# Altium PCB OSU_Robotics_Kids.PcbDoc (part 2 of 3)
Units mm, origin at the board's own origin, x right, y up, seen from the top; angles counter-clockwise.
Board outline 80 x 40 mm, 2 copper layers (Top Layer, Bottom Layer); 19 components, 0 nets, 262 pads, 0 vias.
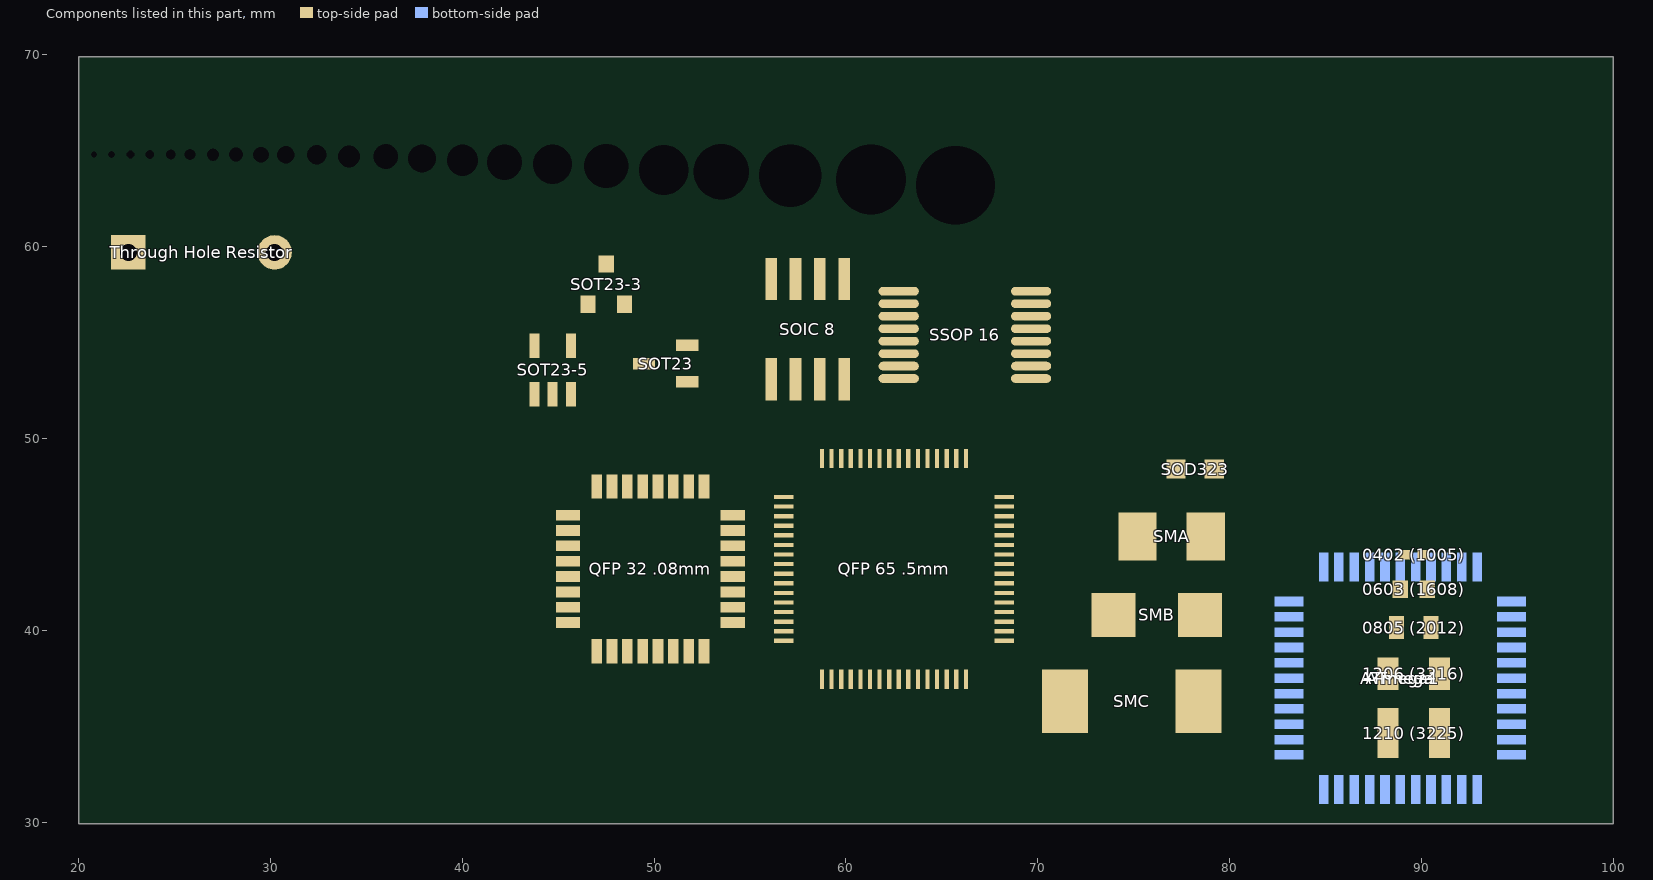
[diagram p2: the components of this part, seen from the top]

## Nets (pads, with @x,y where several pads share a name; then routed paths per layer and width w, separated by ;. In a path a pad name is that pad's centre, name@x,y a point inside that pad or via, vN(x,y) a via of type N, cw(c..) or ccw(c..) an arc to the next point about the centre after c; other vN are vias at no path point) (continued)
copper on no net: | length 2661.3
  Top Layer w0.127: 20.5,36.2 21.9,34.8 33,34.8
  Top Layer w0.254: 20.32,29.872 20.32,31.65 ; 20.5,36.9 22,35.4 25.4,35.4 26.9,35.4 33,35.4 ; 21,68.9 21,69.9 ; 22,68.9 22,69.9 ; 22.86,29.872 22.86,31.65 ; 23,68.9 23,69.9 ; 24,68.9 24,69.9 ; 25,67.9 25,69.9 ; 25.4,29.872 25.4,31.65 ; 26,68.9 26,69.9 ; 27,68.9 27,69.9 ; 27.94,29.872 27.94,31.65 ; 28,68.9 28,69.9 ; 29,68.9 29,69.9 ; 30,66.9 30,69.9 ; 30.48,29.872 30.48,31.65 ; 31,68.9 31,69.9 ; 32,68.9 32,69.9 ; 33,68.9 33,69.9 ; 33.02,29.872 33.02,32.412 ; 34,68.9 34,69.9 ; 35,67.9 35,69.9 ; 35.56,29.872 35.56,31.65 ; 36,68.9 36,69.9 ; 37,68.9 37,69.9 ; 38,68.9 38,69.9 ; 38.1,29.872 38.1,31.65 ; 39,68.9 39,69.9 ; 40,66.9 40,69.9 ; 40.64,29.872 40.64,31.65 ; 41,68.9 41,69.9 ; 42,68.9 42,69.9 ; 43,68.9 43,69.9 ; 43.18,29.872 43.18,31.65 ; 44,68.9 44,69.9 ; 45,67.9 45,69.9 ; 45.72,29.872 45.72,32.92 ; 46,68.9 46,69.9 ; 47,68.9 47,69.9 ; 48,68.9 48,69.9 ; 48.26,29.872 48.26,31.65 ; 49,68.9 49,69.9 ; 50,66.9 50,69.9 ; 50.8,29.872 50.8,31.65 ; 51,68.9 51,69.9 ; 52,68.9 52,69.9 ; 53,68.9 53,69.9 ; 53.34,29.872 53.34,31.65 ; 54,68.9 54,69.9 ; 55,67.9 55,69.9 ; 55.88,29.872 55.88,31.65 ; 56,68.9 56,69.9 ; 57,68.9 57,69.9 ; 58,68.9 58,69.9 ; 58.42,29.872 58.42,31.65 ; 59,68.9 59,69.9 ; 60,66.9 60,69.9 ; 60.96,29.872 60.96,32.412 ; 61,68.9 61,69.9 ; 62,68.9 62,69.9 ; 63,68.9 63,69.9 ; 63.5,29.872 63.5,31.65 ; 64,68.9 64,69.9 ; 65,67.9 65,69.9 ; 66,68.9 66,69.9 ; 66.04,29.872 66.04,31.65 ; 67,68.9 67,69.9 ; 68,68.9 68,69.9 ; 68.58,29.872 68.58,31.65 ; 69,68.9 69,69.9 ; 70,66.9 70,69.9 ; 71,68.9 71,69.9 ; 71.12,29.872 71.12,31.65 ; 72,68.9 72,69.9 ; 73,68.9 73,69.9 ; 73.66,29.872 73.66,32.92 ; 74,68.9 74,69.9 ; 75,67.9 75,69.9 ; 76,68.9 76,69.9 ; 76.2,29.872 76.2,31.65 ; 77,68.9 77,69.9 ; 78,68.9 78,69.9 ; 78.74,29.872 78.74,31.65 ; 79,68.9 79,69.9 ; 80,66.9 80,69.9 ; 81,68.9 81,69.9 ; 81.28,29.872 81.28,31.65 ; 82,68.9 82,69.9 ; 83,68.9 83,69.9 ; 83.82,29.872 83.82,31.65 ; 84,68.9 84,69.9 ; 85,67.9 85,69.9 ; 86,68.9 86,69.9 ; 86.36,29.872 86.36,31.65 ; 87,68.9 87,69.9 ; 88,68.9 88,69.9 ; 88.9,29.872 88.9,32.412 ; 89,68.9 89,69.9 ; 90,66.9 90,69.9 ; 91,68.9 91,69.9 ; 91.44,29.872 91.44,31.65 ; 92,68.9 92,69.9 ; 93,68.9 93,69.9 ; 93.98,29.872 93.98,31.65 ; 94,68.9 94,69.9 ; 95,67.9 95,69.9 ; 96,68.9 96,69.9 ; 96.52,29.872 96.52,31.65 ; 97,68.9 97,69.9 ; 98,68.9 98,69.9 ; 99,68.9 99,69.9 ; 99.06,29.872 99.06,31.65
  Top Layer w0.305: 20.5,37.7 20.8,37.4 22.2,36 26.6,36 33,36
  Top Layer w0.381: 20.5,38.5 22.403,36.597 32.9,36.597
  Top Layer w0.508: 20.5,39.5 22.705,37.295 32.9,37.295
  Top Layer w0.635: 20.5,40.6 22.979,38.121 32.9,38.121
  Top Layer w1.27: 20.8,41.9 23.373,39.327 32.497,39.327 32.5,39.33
  Bottom Layer w0.077: 68.259,62.058 71.557,62.058 ; 68.259,62.211 72.171,62.211 ; 68.259,62.364 72.478,62.364 ; 68.259,62.594 72.861,62.594 ; 68.259,62.748 73.015,62.748 ; 68.259,62.901 73.168,62.901 ; 68.259,63.055 73.321,63.055 ; 68.259,63.208 73.475,63.208 ; 68.259,67.887 73.245,67.887 ; 68.259,68.041 73.091,68.041 ; 68.259,68.194 73.015,68.194 ; 68.259,68.348 72.785,68.348 ; 68.259,68.501 72.554,68.501 ; 68.259,68.654 72.324,68.654 ; 68.259,68.808 72.094,68.808 ; 68.259,68.961 71.711,68.961 ; 68.259,69.115 71.02,69.115 ; 68.335,61.904 68.412,61.904 ; 68.335,61.981 71.327,61.981 ; 68.335,62.134 71.941,62.134 ; 68.335,62.288 72.324,62.288 ; 68.335,62.441 72.631,62.441 ; 68.335,62.518 72.708,62.518 ; 68.335,62.671 72.938,62.671 ; 68.335,62.825 73.168,62.825 ; 68.335,62.978 73.245,62.978 ; 68.335,63.131 73.398,63.131 ; 68.335,67.964 73.245,67.964 ; 68.335,68.117 73.091,68.117 ; 68.335,68.271 72.861,68.271 ; 68.335,68.424 72.708,68.424 ; 68.335,68.578 72.478,68.578 ; 68.335,68.731 72.171,68.731 ; 68.335,68.885 71.864,68.885 ; 68.335,69.038 71.404,69.038 ; 68.335,69.191 68.412,69.191 ; 68.412,63.285 68.566,63.285 ; 68.489,61.904 68.566,61.904 ; 68.566,67.811 68.642,67.811 ; 68.566,69.191 68.642,69.191 ; 68.642,61.904 68.719,61.904 ; 68.719,63.285 68.796,63.285 ; 68.719,69.191 68.796,69.191 ; 68.796,61.904 68.872,61.904 ; 68.796,67.811 68.872,67.811 ; 68.872,63.285 68.949,63.285 ; 68.872,69.191 69.026,69.191 ; 69.026,61.904 69.103,61.904 ; 69.026,63.285 69.103,63.285 ; 69.103,69.191 69.179,69.191 ; 69.179,61.904 69.256,61.904 ; 69.179,63.285 69.256,63.285 ; 69.179,67.811 69.256,67.811 ; 69.256,69.191 69.333,69.191 ; 69.333,63.285 69.409,63.285 ; 69.409,61.904 69.486,61.904 ; 69.409,67.811 69.486,67.811 ; 69.409,69.191 69.486,69.191 ; 69.486,59.449 70.1,59.449 ; 69.486,59.526 70.023,59.526 ; 69.486,59.603 70.1,59.603 ; 69.486,59.68 70.023,59.68 ; 69.486,59.756 70.023,59.756 ; 69.486,59.833 70.1,59.833 ; 69.486,59.986 70.1,59.986 ; 69.486,63.285 69.64,63.285 ; 69.563,59.219 70.253,59.219 ; 69.563,59.296 70.176,59.296 ; 69.563,59.373 70.1,59.373 ; 69.563,59.91 70.1,59.91 ; 69.563,60.063 70.253,60.063 ; 69.563,60.14 70.33,60.14 ; 69.563,69.191 69.64,69.191 ; 69.64,59.066 71.327,59.066 ; 69.64,59.143 70.483,59.143 ; 69.64,60.217 71.327,60.217 ; 69.64,60.293 71.404,60.293 ; 69.64,61.904 69.716,61.904 ; 69.716,58.989 71.327,58.989 ; 69.716,60.37 70.713,60.37 ; 69.716,69.191 69.793,69.191 ; 69.793,63.285 69.87,63.285 ; 69.793,67.811 69.946,67.811 ; 69.87,58.912 70.713,58.912 ; 69.87,60.447 70.56,60.447 ; 69.87,61.904 69.946,61.904 ; 69.87,69.191 69.946,69.191 ; 69.946,58.836 70.637,58.836 ; 69.946,63.285 70.1,63.285 ; 70.023,69.191 70.1,69.191 ; 70.1,60.523 70.33,60.523 ; 70.1,61.904 70.253,61.904 ; 70.176,58.759 70.253,58.759 ; 70.253,63.285 70.407,63.285 ; 70.253,67.811 70.33,67.811 ; 70.253,69.191 70.33,69.191 ; 70.33,58.759 70.407,58.759 ; 70.33,61.904 70.407,61.904 ; 70.407,60.14 71.327,60.14 ; 70.407,67.811 73.398,67.811 ; 70.407,69.191 70.483,69.191 ; 70.483,61.904 70.56,61.904 ; 70.483,63.285 73.552,63.285 ; 70.56,59.143 71.404,59.143 ; 70.56,69.191 70.637,69.191 ; 70.637,59.219 71.327,59.219 ; 70.637,61.904 70.713,61.904 ; 70.713,59.296 71.404,59.296 ; 70.713,59.986 71.327,59.986 ; 70.713,60.063 71.327,60.063 ; 70.79,58.912 71.404,58.912 ; 70.79,59.373 71.327,59.373 ; 70.79,59.449 71.327,59.449 ; 70.79,59.526 71.404,59.526 ; 70.79,59.68 71.404,59.68 ; 70.79,59.756 71.327,59.756 ; 70.79,59.833 71.404,59.833 ; 70.79,59.91 71.327,59.91 ; 70.79,60.37 71.327,60.37 ; 70.79,60.447 71.404,60.447 ; 70.79,60.523 71.327,60.523 ; 70.79,60.677 71.404,60.677 ; 70.79,60.753 71.327,60.753 ; 70.79,60.83 71.327,60.83 ; 70.79,60.907 71.404,60.907 ; 70.79,61.06 71.327,61.06 ; 70.79,61.137 71.404,61.137 ; 70.79,61.214 71.327,61.214 ; 70.79,61.29 70.867,61.29 ; 70.79,67.734 73.398,67.734 ; 70.867,58.836 71.327,58.836 ; 70.867,59.603 71.327,59.603 ; 70.867,60.6 71.404,60.6 ; 70.867,60.984 71.327,60.984 ; 70.867,63.362 73.552,63.362 ; 70.944,61.29 71.02,61.29 ; 71.02,63.438 73.628,63.438 ; 71.02,67.657 73.475,67.657 ; 71.174,61.29 71.25,61.29 ; 71.174,63.515 73.705,63.515 ; 71.174,67.58 73.552,67.58 ; 71.327,67.504 73.552,67.504 ; 71.404,63.592 73.705,63.592 ; 71.404,67.427 73.628,67.427 ; 71.48,63.668 73.782,63.668 ; 71.557,67.35 73.705,67.35 ; 71.634,61.904 71.711,61.904 ; 71.634,62.058 71.711,62.058 ; 71.634,63.745 73.782,63.745 ; 71.634,63.822 73.858,63.822 ; 71.634,67.274 73.705,67.274 ; 71.711,67.197 73.705,67.197 ; 71.787,58.836 72.324,58.836 ; 71.787,59.066 73.475,59.066 ; 71.787,59.219 72.554,59.219 ; 71.787,59.373 72.401,59.373 ; 71.787,59.526 72.401,59.526 ; 71.787,59.603 72.324,59.603 ; 71.787,59.833 72.401,59.833 ; 71.787,59.986 72.401,59.986 ; 71.787,60.14 72.401,60.14 ; 71.787,60.217 72.324,60.217 ; 71.787,60.37 72.401,60.37 ; 71.787,61.981 75.469,61.981 ; 71.787,63.899 73.858,63.899 ; 71.787,67.12 73.782,67.12 ; 71.864,58.912 72.401,58.912 ; 71.864,58.989 72.401,58.989 ; 71.864,59.143 73.475,59.143 ; 71.864,59.296 72.401,59.296 ; 71.864,59.449 72.401,59.449 ; 71.864,59.68 72.401,59.68 ; 71.864,59.756 72.401,59.756 ; 71.864,59.91 72.324,59.91 ; 71.864,60.063 72.401,60.063 ; 71.864,60.293 72.401,60.293 ; 71.864,60.447 72.401,60.447 ; 71.864,63.975 73.935,63.975 ; 71.864,67.044 73.858,67.044 ; 71.941,64.052 73.935,64.052 ; 71.941,64.129 73.935,64.129 ; 71.941,66.967 73.858,66.967 ; 72.017,64.205 74.012,64.205 ; 72.017,66.813 73.935,66.813 ; 72.017,66.89 73.858,66.89 ; 72.094,62.058 75.546,62.058 ; 72.094,64.282 74.012,64.282 ; 72.094,64.359 74.012,64.359 ; 72.094,64.435 74.089,64.435 ; 72.094,66.66 73.935,66.66 ; 72.094,66.737 73.935,66.737 ; 72.171,61.904 72.248,61.904 ; 72.171,64.512 74.012,64.512 ; 72.171,66.507 74.012,66.507 ; 72.171,66.583 74.012,66.583 ; 72.248,64.589 74.089,64.589 ; 72.248,64.666 74.089,64.666 ; 72.248,64.742 74.089,64.742 ; 72.248,64.819 74.165,64.819 ; 72.248,66.276 74.089,66.276 ; 72.248,66.353 74.089,66.353 ; 72.248,66.43 74.012,66.43 ; 72.324,62.134 75.623,62.134 ; 72.324,64.896 74.089,64.896 ; 72.324,64.972 74.165,64.972 ; 72.324,65.049 74.089,65.049 ; 72.324,65.126 74.165,65.126 ; 72.324,65.279 74.165,65.279 ; 72.324,65.433 74.089,65.433 ; 72.324,65.663 74.165,65.663 ; 72.324,65.74 74.165,65.74 ; 72.324,65.893 74.165,65.893 ; 72.324,65.97 74.089,65.97 ; 72.324,66.046 74.089,66.046 ; 72.324,66.123 74.089,66.123 ; 72.324,66.2 74.089,66.2 ; 72.401,65.203 74.165,65.203 ; 72.401,65.356 74.165,65.356 ; 72.401,65.509 74.165,65.509 ; 72.401,65.586 74.165,65.586 ; 72.401,65.816 74.089,65.816 ; 72.478,58.912 73.398,58.912 ; 72.478,58.989 73.475,58.989 ; 72.478,61.904 72.554,61.904 ; 72.478,62.211 75.623,62.211 ; 72.631,58.836 73.245,58.836 ; 72.631,62.288 75.699,62.288 ; 72.708,61.904 72.785,61.904 ; 72.785,62.364 75.776,62.364 ; 72.861,58.759 72.938,58.759 ; 72.861,61.904 72.938,61.904 ; 72.861,62.441 75.776,62.441 ; 72.938,59.219 73.552,59.219 ; 72.938,59.296 73.552,59.296 ; 73.015,58.759 73.091,58.759 ; 73.015,59.373 73.552,59.373 ; 73.015,59.449 73.552,59.449 ; 73.015,59.526 73.552,59.526 ; 73.015,59.603 73.552,59.603 ; 73.015,59.68 73.552,59.68 ; 73.015,59.756 73.552,59.756 ; 73.015,59.833 73.552,59.833 ; 73.015,59.91 73.552,59.91 ; 73.015,59.986 73.552,59.986 ; 73.015,60.063 73.552,60.063 ; 73.015,60.14 73.552,60.14 ; 73.015,60.217 73.552,60.217 ; 73.015,60.293 73.552,60.293 ; 73.015,60.37 73.552,60.37 ; 73.015,60.447 73.552,60.447 ; 73.015,62.518 75.853,62.518 ; 73.015,62.594 75.853,62.594 ; 73.091,61.904 73.168,61.904 ; 73.168,62.671 75.93,62.671 ; 73.245,62.748 76.006,62.748 ; 73.321,61.904 73.398,61.904 ; 73.321,62.825 76.006,62.825 ; 73.398,62.901 76.083,62.901 ; 73.475,62.978 76.16,62.978 ; 73.552,61.904 73.628,61.904 ; 73.552,63.055 76.16,63.055 ; 73.628,63.131 76.236,63.131 ; 73.705,63.208 76.236,63.208 ; 73.782,61.904 73.935,61.904 ; 73.782,63.285 73.858,63.285 ; 73.935,59.219 74.549,59.219 ; 73.935,59.68 74.549,59.68 ; 73.935,60.447 74.549,60.447 ; 73.935,60.907 74.549,60.907 ; 73.935,63.285 74.012,63.285 ; 74.012,58.836 74.549,58.836 ; 74.012,58.912 74.549,58.912 ; 74.012,58.989 74.549,58.989 ; 74.012,59.066 74.549,59.066 ; 74.012,59.143 74.549,59.143 ; 74.012,59.296 74.549,59.296 ; 74.012,59.373 74.549,59.373 ; 74.012,59.449 74.549,59.449 ; 74.012,59.526 74.549,59.526 ; 74.012,59.603 74.549,59.603 ; 74.012,59.756 74.549,59.756 ; 74.012,59.833 74.549,59.833 ; 74.012,59.91 74.549,59.91 ; 74.012,59.986 74.549,59.986 ; 74.012,60.063 74.549,60.063 ; 74.012,60.14 74.549,60.14 ; 74.012,60.217 74.549,60.217 ; 74.012,60.293 74.549,60.293 ; 74.012,60.37 74.549,60.37 ; 74.012,60.523 74.549,60.523 ; 74.012,60.6 74.549,60.6 ; 74.012,60.677 74.549,60.677 ; 74.012,60.753 74.549,60.753 ; 74.012,60.83 74.549,60.83 ; 74.012,60.984 74.549,60.984 ; 74.012,61.06 74.549,61.06 ; 74.012,61.137 74.549,61.137 ; 74.012,61.214 74.549,61.214 ; 74.012,61.904 74.089,61.904 ; 74.089,61.29 74.165,61.29 ; 74.089,63.285 74.165,63.285 ; 74.165,61.904 74.242,61.904 ; 74.242,61.29 74.319,61.29 ; 74.242,63.285 74.319,63.285 ; 74.319,61.904 74.395,61.904 ; 74.395,61.29 74.472,61.29 ; 74.395,63.285 76.313,63.285 ; 74.395,66.89 76.16,66.89 ; 74.395,66.967 76.16,66.967 ; 74.395,67.044 76.16,67.044 ; 74.395,67.12 76.236,67.12 ; 74.395,67.197 76.16,67.197 ; 74.395,67.274 76.236,67.274 ; 74.395,67.35 76.236,67.35 ; 74.395,67.427 76.236,67.427 ; 74.395,67.504 76.313,67.504 ; 74.395,67.657 76.467,67.657 ; 74.472,63.362 76.39,63.362 ; 74.472,66.583 76.236,66.583 ; 74.472,66.66 76.236,66.66 ; 74.472,66.737 76.236,66.737 ; 74.472,66.813 76.236,66.813 ; 74.472,67.58 76.313,67.58 ; 74.472,67.734 76.467,67.734 ; 74.472,67.811 76.62,67.811 ; 74.472,67.887 76.85,67.887 ; 74.549,61.904 74.626,61.904 ; 74.549,63.438 76.39,63.438 ; 74.549,63.515 76.467,63.515 ; 74.549,66.43 76.39,66.43 ; 74.549,66.507 76.313,66.507 ; 74.549,67.964 77.08,67.964 ; 74.549,68.041 80.379,68.041 ; 74.626,63.592 76.543,63.592 ; 74.626,66.2 76.543,66.2 ; 74.626,66.276 76.467,66.276 ; 74.626,66.353 76.39,66.353 ; 74.626,68.117 80.379,68.117 ; 74.626,68.194 80.379,68.194 ; 74.702,61.904 74.779,61.904 ; 74.702,63.668 76.543,63.668 ; 74.702,63.745 76.62,63.745 ; 74.702,66.123 76.697,66.123 ; 74.702,68.271 80.379,68.271 ; 74.702,68.348 80.379,68.348 ; 74.779,63.822 76.62,63.822 ; 74.779,66.046 76.85,66.046 ; 74.779,68.424 80.379,68.424 ; 74.856,59.066 76.236,59.066 ; 74.856,60.37 76.006,60.37 ; 74.856,63.899 76.697,63.899 ; 74.856,63.975 76.773,63.975 ; 74.856,65.893 79.842,65.893 ; 74.856,65.97 77.08,65.97 ; 74.856,68.501 80.379,68.501 ; 74.932,58.912 76.006,58.912 ; 74.932,58.989 76.083,58.989 ; 74.932,59.143 75.316,59.143 ; 74.932,59.219 75.009,59.219 ; 74.932,60.063 75.009,60.063 ; 74.932,60.14 75.239,60.14 ; 74.932,60.217 76.16,60.217 ; 74.932,60.293 76.083,60.293 ; 74.932,60.447 75.853,60.447 ; 74.932,61.904 75.009,61.904 ; 74.932,64.052 76.773,64.052 ; 74.932,68.578 80.379,68.578 ; 75.009,58.836 75.853,58.836 ; 75.009,64.129 76.85,64.129 ; 75.009,64.205 76.927,64.205 ; 75.009,65.74 79.842,65.74 ; 75.009,65.816 79.765,65.816 ; 75.009,68.654 80.379,68.654 ; 75.086,64.282 76.927,64.282 ; 75.162,60.523 75.469,60.523 ; 75.162,61.904 75.239,61.904 ; 75.162,64.359 77.003,64.359 ; 75.162,64.435 77.157,64.435 ; 75.162,65.663 79.842,65.663 ; 75.162,68.731 80.379,68.731 ; 75.239,58.759 75.316,58.759 ; 75.239,64.512 77.157,64.512 ; 75.239,65.586 79.765,65.586 ; 75.239,68.808 80.379,68.808 ; 75.316,60.14 76.236,60.14 ; 75.316,65.509 79.842,65.509 ; 75.393,59.143 76.236,59.143 ; 75.393,61.904 75.469,61.904 ; 75.393,64.589 77.31,64.589 ; 75.393,64.666 77.464,64.666 ; 75.393,68.885 80.379,68.885 ; 75.469,58.759 75.546,58.759 ; 75.469,64.742 79.842,64.742 ; 75.469,65.433 79.765,65.433 ; 75.546,64.819 79.765,64.819 ; 75.546,68.961 80.379,68.961 ; 75.623,58.759 75.699,58.759 ; 75.623,59.219 76.313,59.219 ; 75.623,60.063 76.313,60.063 ; 75.623,64.896 79.842,64.896 ; 75.623,65.356 79.765,65.356 ; 75.699,59.296 76.313,59.296 ; 75.699,59.986 76.313,59.986 ; 75.699,64.972 79.842,64.972 ; 75.699,65.279 75.776,65.279 ; 75.776,59.373 76.39,59.373 ; 75.776,59.449 76.39,59.449 ; 75.776,59.68 76.39,59.68 ; 75.776,59.833 76.39,59.833 ; 75.776,59.91 76.313,59.91 ; 75.853,59.526 76.39,59.526 ; 75.853,59.603 76.39,59.603 ; 75.853,59.756 76.39,59.756 ; 75.853,65.049 79.765,65.049 ; 75.853,65.279 79.842,65.279 ; 75.853,69.038 80.379,69.038 ; 76.006,65.126 79.842,65.126 ; 76.006,65.203 79.842,65.203 ; 76.083,69.115 76.16,69.115 ; 76.236,69.115 80.379,69.115 ; 76.467,69.191 76.543,69.191 ; 76.62,59.066 77.31,59.066 ; 76.697,58.912 77.31,58.912 ; 76.697,58.989 77.31,58.989 ; 76.697,59.143 77.31,59.143 ; 76.773,58.836 77.234,58.836 ; 76.773,59.219 77.234,59.219 ; 76.773,69.191 76.85,69.191 ; 76.85,59.296 77.003,59.296 ; 76.927,58.759 77.003,58.759 ; 76.927,69.191 77.003,69.191 ; 77.08,69.191 77.157,69.191 ; 77.157,67.964 77.387,67.964 ; 77.234,69.191 77.31,69.191 ; 77.387,69.191 77.464,69.191 ; 77.464,67.964 77.54,67.964 ; 77.54,59.219 78.154,59.219 ; 77.54,59.373 78.231,59.373 ; 77.617,59.066 78.921,59.066 ; 77.617,59.143 78.231,59.143 ; 77.617,59.296 78.077,59.296 ; 77.617,59.449 78.308,59.449 ; 77.617,59.526 78.614,59.526 ; 77.617,59.603 78.768,59.603 ; 77.617,60.447 78.614,60.447 ; 77.617,67.964 77.771,67.964 ; 77.617,69.191 77.694,69.191 ; 77.694,58.989 78.921,58.989 ; 77.694,60.14 77.847,60.14 ; 77.694,60.217 78.921,60.217 ; 77.694,60.293 78.844,60.293 ; 77.694,60.37 78.768,60.37 ; 77.771,58.912 78.998,58.912 ; 77.771,59.68 78.844,59.68 ; 77.771,69.191 77.847,69.191 ; 77.847,67.964 77.924,67.964 ; 77.924,58.836 78.921,58.836 ; 77.924,59.756 78.921,59.756 ; 77.924,60.523 78.231,60.523 ; 77.924,69.191 78.001,69.191 ; 78.001,67.964 79.842,67.964 ; 78.077,59.833 78.921,59.833 ; 78.077,62.134 79.765,62.134 ; 78.077,62.364 79.765,62.364 ; 78.077,62.671 79.842,62.671 ; 78.077,62.825 79.842,62.825 ; 78.077,63.055 79.842,63.055 ; 78.077,63.285 79.842,63.285 ; 78.077,63.592 79.765,63.592 ; 78.077,63.745 79.842,63.745 ; 78.077,63.975 79.842,63.975 ; 78.077,64.205 79.765,64.205 ; 78.077,64.435 79.842,64.435 ; 78.077,64.666 79.842,64.666 ; 78.077,65.97 79.842,65.97 ; 78.077,66.123 79.842,66.123 ; 78.077,66.353 79.842,66.353 ; 78.077,66.66 79.765,66.66 ; 78.077,66.813 79.765,66.813 ; 78.077,67.044 79.765,67.044 ; 78.077,67.274 79.765,67.274 ; 78.077,67.504 79.842,67.504 ; 78.077,67.734 79.842,67.734 ; 78.077,69.191 78.231,69.191 ; 78.154,61.981 79.842,61.981 ; 78.154,62.058 79.842,62.058 ; 78.154,62.211 79.842,62.211 ; 78.154,62.288 79.842,62.288 ; 78.154,62.441 79.842,62.441 ; 78.154,62.518 79.842,62.518 ; 78.154,62.594 79.765,62.594 ; 78.154,62.748 79.842,62.748 ; 78.154,62.901 79.765,62.901 ; 78.154,62.978 79.765,62.978 ; 78.154,63.131 79.765,63.131 ; 78.154,63.208 79.842,63.208 ; 78.154,63.362 79.765,63.362 ; 78.154,63.438 79.842,63.438 ; 78.154,63.515 79.842,63.515 ; 78.154,63.668 79.842,63.668 ; 78.154,63.822 79.765,63.822 ; 78.154,63.899 79.842,63.899 ; 78.154,64.052 79.842,64.052 ; 78.154,64.129 79.765,64.129 ; 78.154,64.282 79.842,64.282 ; 78.154,64.359 79.765,64.359 ; 78.154,64.512 79.842,64.512 ; 78.154,64.589 79.765,64.589 ; 78.154,66.046 79.765,66.046 ; 78.154,66.2 79.842,66.2 ; 78.154,66.276 79.765,66.276 ; 78.154,66.43 79.842,66.43 ; 78.154,66.507 79.842,66.507 ; 78.154,66.583 79.765,66.583 ; 78.154,66.737 79.842,66.737 ; 78.154,66.89 79.842,66.89 ; 78.154,66.967 79.842,66.967 ; 78.154,67.12 79.842,67.12 ; 78.154,67.197 79.842,67.197 ; 78.154,67.35 79.842,67.35 ; 78.154,67.427 79.842,67.427 ; 78.154,67.58 79.765,67.58 ; 78.154,67.657 79.842,67.657 ; 78.154,67.811 79.765,67.811 ; 78.154,67.887 79.842,67.887 ; 78.231,58.759 78.308,58.759 ; 78.231,61.904 78.308,61.904 ; 78.308,59.91 78.921,59.91 ; 78.308,60.14 78.921,60.14 ; 78.308,69.191 78.384,69.191 ; 78.384,58.759 78.461,58.759 ; 78.384,59.986 78.921,59.986 ; 78.384,60.063 78.921,60.063 ; 78.384,60.523 78.461,60.523 ; 78.384,61.904 78.461,61.904 ; 78.538,58.759 78.614,58.759 ; 78.538,59.143 78.614,59.143 ; 78.538,69.191 78.614,69.191 ; 78.614,61.904 78.691,61.904 ; 78.691,59.143 78.921,59.143 ; 78.768,69.191 78.844,69.191 ; 78.844,61.904 78.921,61.904 ; 78.921,69.191 78.998,69.191 ; 79.075,61.904 79.151,61.904 ; 79.075,69.191 79.151,69.191 ; 79.151,58.912 80.225,58.912 ; 79.151,58.989 80.379,58.989 ; 79.151,59.066 80.455,59.066 ; 79.151,59.143 79.612,59.143 ; 79.151,59.219 79.228,59.219 ; 79.151,60.063 79.228,60.063 ; 79.151,60.217 80.455,60.217 ; 79.151,60.293 80.302,60.293 ; 79.151,60.447 80.149,60.447 ; 79.228,58.836 80.149,58.836 ; 79.228,60.14 79.535,60.14 ; 79.228,60.37 80.225,60.37 ; 79.228,69.191 79.305,69.191 ; 79.305,61.904 79.458,61.904 ; 79.458,60.523 79.688,60.523 ; 79.458,69.191 79.535,69.191 ; 79.535,58.759 79.612,58.759 ; 79.535,61.904 79.612,61.904 ; 79.612,60.14 80.532,60.14 ; 79.612,69.191 79.688,69.191 ; 79.688,58.759 79.765,58.759 ; 79.688,59.143 80.532,59.143 ; 79.765,60.523 79.842,60.523 ; 79.765,69.191 79.842,69.191 ; 79.842,58.759 79.918,58.759 ; 79.842,60.063 80.532,60.063 ; 79.918,59.219 80.532,59.219 ; 79.918,59.296 80.609,59.296 ; 79.918,67.964 80.072,67.964 ; 79.918,69.191 80.072,69.191 ; 79.995,59.373 80.609,59.373 ; 79.995,59.91 80.609,59.91 ; 79.995,59.986 80.609,59.986 ; 80.072,59.449 80.609,59.449 ; 80.072,59.526 80.685,59.526 ; 80.072,59.603 80.609,59.603 ; 80.072,59.68 80.685,59.68 ; 80.072,59.756 80.609,59.756 ; 80.072,59.833 80.609,59.833 ; 80.149,67.964 80.225,67.964 ; 80.225,69.191 80.302,69.191 ; 80.302,67.964 80.379,67.964 ; 80.532,64.896 82.296,64.896 ; 80.532,65.126 82.296,65.126 ; 80.532,65.433 82.296,65.433 ; 80.532,65.74 82.296,65.74 ; 80.532,66.046 82.296,66.046 ; 80.532,66.353 82.22,66.353 ; 80.532,66.66 82.296,66.66 ; 80.532,66.967 82.296,66.967 ; 80.532,67.274 82.296,67.274 ; 80.532,67.58 82.296,67.58 ; 80.532,67.887 82.296,67.887 ; 80.532,68.194 82.296,68.194 ; 80.532,68.501 82.296,68.501 ; 80.532,68.808 82.22,68.808 ; 80.532,69.115 82.296,69.115 ; 80.609,64.282 82.373,64.282 ; 80.609,64.435 82.296,64.435 ; 80.609,64.512 82.373,64.512 ; 80.609,64.589 82.296,64.589 ; 80.609,64.666 82.296,64.666 ; 80.609,64.742 82.296,64.742 ; 80.609,64.819 82.296,64.819 ; 80.609,64.972 82.296,64.972 ; 80.609,65.049 82.296,65.049 ; 80.609,65.203 82.296,65.203 ; 80.609,65.279 82.296,65.279 ; 80.609,65.356 82.22,65.356 ; 80.609,65.509 82.296,65.509 ; 80.609,65.586 82.296,65.586 ; 80.609,65.663 82.22,65.663 ; 80.609,65.816 82.296,65.816 ; 80.609,65.893 82.296,65.893 ; 80.609,65.97 82.296,65.97 ; 80.609,66.123 82.22,66.123 ; 80.609,66.2 82.296,66.2 ; 80.609,66.276 82.296,66.276 ; 80.609,66.43 82.296,66.43 ; 80.609,66.507 82.296,66.507 ; 80.609,66.583 82.22,66.583 ; 80.609,66.737 82.296,66.737 ; 80.609,66.813 82.296,66.813 ; 80.609,66.89 82.296,66.89 ; 80.609,67.044 82.296,67.044 ; 80.609,67.12 82.296,67.12 ; 80.609,67.197 82.22,67.197 ; 80.609,67.35 82.296,67.35 ; 80.609,67.427 82.296,67.427 ; 80.609,67.504 82.296,67.504 ; 80.609,67.657 82.296,67.657 ; 80.609,67.734 82.296,67.734 ; 80.609,67.811 82.22,67.811 ; 80.609,67.964 82.296,67.964 ; 80.609,68.041 82.296,68.041 ; 80.609,68.117 82.22,68.117 ; 80.609,68.271 82.296,68.271 ; 80.609,68.348 82.296,68.348 ; 80.609,68.424 82.296,68.424 ; 80.609,68.578 82.22,68.578 ; 80.609,68.654 82.296,68.654 ; 80.609,68.731 82.296,68.731 ; 80.609,68.885 82.296,68.885 ; 80.609,68.961 82.296,68.961 ; 80.609,69.038 82.22,69.038 ; 80.609,69.191 80.685,69.191 ; 80.685,63.822 82.526,63.822 ; 80.685,63.975 82.45,63.975 ; 80.685,64.052 82.45,64.052 ; 80.685,64.129 82.373,64.129 ; 80.685,64.205 82.373,64.205 ; 80.685,64.359 82.296,64.359 ; 80.762,63.668 82.68,63.668 ; 80.762,63.745 82.603,63.745 ; 80.762,63.899 82.45,63.899 ; 80.762,69.191 80.839,69.191 ; 80.839,63.515 82.833,63.515 ; 80.839,63.592 82.68,63.592 ; 80.916,63.285 83.37,63.285 ; 80.916,63.362 83.14,63.362 ; 80.916,63.438 82.91,63.438 ; 80.916,69.191 80.992,69.191 ; 80.992,58.836 81.222,58.836 ; 80.992,58.912 81.529,58.912 ; 80.992,58.989 81.606,58.989 ; 80.992,59.066 81.529,59.066 ; 80.992,59.143 81.529,59.143 ; 80.992,59.219 81.606,59.219 ; 80.992,59.296 81.529,59.296 ; 80.992,59.373 81.606,59.373 ; 80.992,59.449 81.529,59.449 ; 80.992,59.526 81.606,59.526 ; 80.992,59.603 81.529,59.603 ; 80.992,59.68 81.606,59.68 ; 80.992,59.756 81.606,59.756 ; 80.992,59.833 81.529,59.833 ; 80.992,59.91 81.606,59.91 ; 80.992,59.986 81.529,59.986 ; 80.992,60.063 81.606,60.063 ; 80.992,60.14 81.529,60.14 ; 80.992,60.217 81.606,60.217 ; 80.992,60.293 81.529,60.293 ; 80.992,60.37 81.529,60.37 ; 80.992,60.447 81.606,60.447 ; 80.992,60.907 81.606,60.907 ; 80.992,60.984 81.606,60.984 ; 80.992,61.06 81.606,61.06 ; 80.992,61.137 81.529,61.137 ; 80.992,63.208 86.439,63.208 ; 81.069,60.83 81.529,60.83 ; 81.069,61.214 81.529,61.214 ; 81.069,63.055 86.285,63.055 ; 81.069,63.131 86.362,63.131 ; 81.069,69.191 81.146,69.191 ; 81.146,60.753 81.376,60.753 ; 81.146,62.978 86.285,62.978 ; 81.222,61.29 81.299,61.29 ; 81.222,62.901 86.208,62.901 ; 81.299,58.836 81.606,58.836 ; 81.299,62.748 86.055,62.748 ; 81.299,62.825 86.208,62.825 ; 81.299,69.191 81.376,69.191 ; 81.376,62.671 86.055,62.671 ; 81.453,69.191 81.529,69.191 ; 81.529,62.594 85.902,62.594 ; 81.606,62.518 85.825,62.518 ; 81.606,69.191 81.683,69.191 ; 81.683,62.441 85.748,62.441 ; 81.759,69.191 81.913,69.191 ; 81.836,58.836 82.526,58.836 ; 81.836,58.989 82.757,58.989 ; 81.836,59.066 82.757,59.066 ; 81.836,60.217 83.063,60.217 ; 81.836,60.293 83.14,60.293 ; 81.836,60.37 83.063,60.37 ; 81.836,62.364 85.595,62.364 ; 81.913,58.912 82.68,58.912 ; 81.913,59.143 82.757,59.143 ; 81.913,60.14 83.063,60.14 ; 81.913,60.447 83.14,60.447 ; 81.989,62.288 85.441,62.288 ; 81.989,69.191 82.066,69.191 ; 82.066,58.759 82.143,58.759 ; 82.066,62.211 85.365,62.211 ; 82.143,69.191 82.22,69.191 ; 82.22,58.759 82.296,58.759 ; 82.22,59.219 82.833,59.219 ; 82.22,59.296 82.757,59.296 ; 82.22,59.373 82.833,59.373 ; 82.22,59.449 82.833,59.449 ; 82.22,59.68 82.833,59.68 ; 82.22,59.756 82.833,59.756 ; 82.22,59.986 82.833,59.986 ; 82.22,60.523 82.833,60.523 ; 82.22,60.753 82.833,60.753 ; 82.22,60.907 82.603,60.907 ; 82.296,59.526 82.833,59.526 ; 82.296,59.603 82.757,59.603 ; 82.296,59.833 82.757,59.833 ; 82.296,59.91 82.833,59.91 ; 82.296,60.063 82.833,60.063 ; 82.296,60.6 82.833,60.6 ; 82.296,60.677 82.833,60.677 ; 82.296,60.83 82.757,60.83 ; 82.296,62.134 85.135,62.134 ; 82.526,62.058 84.981,62.058 ; 82.833,61.981 84.444,61.981 ; 83.294,59.526 83.83,59.526 ; 83.294,59.603 83.83,59.603 ; 83.294,59.68 83.907,59.68 ; 83.294,59.756 83.907,59.756 ; 83.294,59.833 83.83,59.833 ; 83.294,59.91 83.907,59.91 ; 83.37,59.219 83.984,59.219 ; 83.37,59.296 83.984,59.296 ; 83.37,59.373 83.907,59.373 ; 83.37,59.449 83.907,59.449 ; 83.37,59.986 83.907,59.986 ; 83.37,60.063 83.984,60.063 ; 83.447,59.143 85.135,59.143 ; 83.447,60.14 84.137,60.14 ; 83.447,60.217 85.058,60.217 ; 83.447,61.904 83.524,61.904 ; 83.447,63.285 83.6,63.285 ; 83.524,59.066 85.058,59.066 ; 83.524,60.293 84.981,60.293 ; 83.6,58.989 84.981,58.989 ; 83.677,58.912 84.904,58.912 ; 83.677,60.37 84.904,60.37 ; 83.677,61.904 83.754,61.904 ; 83.677,63.285 83.754,63.285 ; 83.754,58.836 84.674,58.836 ; 83.83,60.447 84.674,60.447 ; 83.83,61.904 83.907,61.904 ; 83.907,63.285 86.439,63.285 ; 84.061,60.523 84.214,60.523 ; 84.137,61.904 84.214,61.904 ; 84.214,58.759 84.291,58.759 ; 84.214,60.14 84.291,60.14 ; 84.214,63.362 86.515,63.362 ; 84.291,60.523 84.444,60.523 ; 84.367,58.759 84.444,58.759 ; 84.367,60.14 85.135,60.14 ; 84.444,60.063 85.135,60.063 ; 84.444,63.438 86.515,63.438 ; 84.521,59.219 85.135,59.219 ; 84.521,61.981 84.598,61.981 ; 84.521,63.515 86.515,63.515 ; 84.598,59.296 85.135,59.296 ; 84.598,59.373 85.211,59.373 ; 84.598,59.91 85.211,59.91 ; 84.598,59.986 85.211,59.986 ; 84.674,59.449 85.211,59.449 ; 84.674,59.526 85.211,59.526 ; 84.674,59.603 85.288,59.603 ; 84.674,59.68 85.211,59.68 ; 84.674,59.756 85.211,59.756 ; 84.674,59.833 85.211,59.833 ; 84.674,63.592 86.592,63.592 ; 84.674,63.668 86.592,63.668 ; 84.751,63.745 86.669,63.745 ; 84.828,63.822 86.669,63.822 ; 84.904,63.899 86.669,63.899 ; 84.904,63.975 86.669,63.975 ; 84.981,64.052 86.745,64.052 ; 84.981,64.129 86.669,64.129 ; 84.981,64.205 86.745,64.205 ; 84.981,64.282 86.745,64.282 ; 85.058,64.359 86.745,64.359 ; 85.058,64.435 86.745,64.435 ; 85.058,64.512 86.745,64.512 ; 85.058,64.589 86.822,64.589 ; 85.058,64.666 86.822,64.666 ; 85.058,64.819 86.822,64.819 ; 85.058,65.049 86.745,65.049 ; 85.058,65.203 86.822,65.203 ; 85.058,65.356 86.822,65.356 ; 85.058,65.509 86.745,65.509 ; 85.058,65.586 86.822,65.586 ; 85.058,65.816 86.822,65.816 ; 85.058,65.97 86.745,65.97 ; 85.058,66.123 86.822,66.123 ; 85.058,66.276 86.822,66.276 ; 85.058,66.353 86.745,66.353 ; 85.058,66.583 86.822,66.583 ; 85.058,66.66 86.745,66.66 ; 85.058,66.89 86.822,66.89 ; 85.058,67.044 86.822,67.044 ; 85.058,67.197 86.822,67.197 ; 85.058,67.35 86.822,67.35 ; 85.058,67.427 86.822,67.427 ; 85.058,67.657 86.745,67.657 ; 85.058,67.811 86.822,67.811 ; 85.058,67.964 86.822,67.964 ; 85.058,68.117 86.745,68.117 ; 85.058,68.194 86.822,68.194 ; 85.058,68.424 86.822,68.424 ; 85.058,68.501 86.822,68.501 ; 85.058,68.731 86.822,68.731 ; 85.058,68.885 86.745,68.885 ; 85.058,69.038 86.822,69.038 ; 85.135,64.742 86.745,64.742 ; 85.135,64.896 86.822,64.896 ; 85.135,64.972 86.822,64.972 ; 85.135,65.126 86.822,65.126 ; 85.135,65.279 86.745,65.279 ; 85.135,65.433 86.822,65.433 ; 85.135,65.663 86.822,65.663 ; 85.135,65.74 86.745,65.74 ; 85.135,65.893 86.822,65.893 ; 85.135,66.046 86.822,66.046 ; 85.135,66.2 86.822,66.2 ; 85.135,66.43 86.822,66.43 ; 85.135,66.507 86.745,66.507 ; 85.135,66.737 86.822,66.737 ; 85.135,66.813 86.822,66.813 ; 85.135,66.967 86.745,66.967 ; 85.135,67.12 86.745,67.12 ; 85.135,67.274 86.745,67.274 ; 85.135,67.504 86.745,67.504 ; 85.135,67.58 86.822,67.58 ; 85.135,67.734 86.822,67.734 ; 85.135,67.887 86.745,67.887 ; 85.135,68.041 86.822,68.041 ; 85.135,68.271 86.822,68.271 ; 85.135,68.348 86.745,68.348 ; 85.135,68.578 86.745,68.578 ; 85.135,68.654 86.822,68.654 ; 85.135,68.808 86.822,68.808 ; 85.135,68.961 86.822,68.961 ; 85.135,69.115 86.745,69.115 ; 85.135,69.191 85.211,69.191 ; 85.288,69.191 85.365,69.191 ; 85.441,59.526 86.055,59.526 ; 85.441,59.756 86.055,59.756 ; 85.441,69.191 85.595,69.191 ; 85.518,59.296 86.132,59.296 ; 85.518,59.373 86.132,59.373 ; 85.518,59.449 86.055,59.449 ; 85.518,59.603 86.055,59.603 ; 85.518,59.68 86.055,59.68 ; 85.518,59.833 86.055,59.833 ; 85.518,59.91 86.132,59.91 ; 85.518,59.986 86.132,59.986 ; 85.518,60.063 86.208,60.063 ; 85.595,59.143 87.359,59.143 ; 85.595,59.219 86.208,59.219 ; 85.595,60.14 86.362,60.14 ; 85.595,60.217 87.359,60.217 ; 85.671,59.066 87.359,59.066 ; 85.671,60.293 86.745,60.293 ; 85.671,69.191 85.748,69.191 ; 85.748,58.989 86.745,58.989 ; 85.748,60.37 86.669,60.37 ; 85.825,58.912 86.669,58.912 ; 85.825,60.447 86.592,60.447 ; 85.902,69.191 85.978,69.191 ; 85.978,58.836 86.669,58.836 ; 86.055,60.523 86.208,60.523 ; 86.132,69.191 86.208,69.191 ; 86.208,58.759 86.285,58.759 ; 86.285,60.523 86.362,60.523 ; 86.285,69.191 86.362,69.191 ; 86.362,58.759 86.439,58.759 ; 86.439,60.14 87.359,60.14 ; 86.439,69.191 86.515,69.191 ; 86.592,69.191 86.669,69.191 ; 86.669,59.219 87.359,59.219 ; 86.669,60.063 87.359,60.063 ; 86.745,58.912 87.282,58.912 ; 86.745,59.296 87.359,59.296 ; 86.745,59.91 87.359,59.91 ; 86.745,59.986 87.359,59.986 ; 86.745,60.6 87.359,60.6 ; 86.745,61.06 87.359,61.06 ; 86.822,58.836 87.359,58.836 ; 86.822,58.989 87.359,58.989 ; 86.822,59.373 87.359,59.373 ; 86.822,59.449 87.359,59.449 ; 86.822,59.526 87.359,59.526 ; 86.822,59.603 87.359,59.603 ; 86.822,59.68 87.359,59.68 ; 86.822,59.756 87.359,59.756 ; 86.822,59.833 87.359,59.833 ; 86.822,60.293 87.359,60.293 ; 86.822,60.37 87.359,60.37 ; 86.822,60.447 87.359,60.447 ; 86.822,60.523 87.359,60.523 ; 86.822,60.677 87.359,60.677 ; 86.822,60.753 87.359,60.753 ; 86.822,60.83 87.359,60.83 ; 86.822,60.907 87.359,60.907 ; 86.822,60.984 87.359,60.984 ; 86.822,61.137 87.359,61.137 ; 86.822,61.214 87.359,61.214 ; 86.822,61.29 86.899,61.29 ; 86.976,61.29 87.052,61.29 ; 86.976,68.041 92.038,68.041 ; 86.976,68.194 91.885,68.194 ; 86.976,68.271 91.808,68.271 ; 86.976,68.348 91.808,68.348 ; 86.976,68.501 91.655,68.501 ; 86.976,68.654 91.425,68.654 ; 86.976,68.808 91.194,68.808 ; 86.976,68.961 90.811,68.961 ; 86.976,69.038 90.581,69.038 ; 86.976,69.115 90.197,69.115 ; 87.052,63.822 88.893,63.822 ; 87.052,63.899 88.817,63.899 ; 87.052,64.052 88.893,64.052 ; 87.052,64.205 88.97,64.205 ; 87.052,67.964 87.743,67.964 ; 87.052,68.117 91.962,68.117 ; 87.052,68.424 91.655,68.424 ; 87.052,68.578 91.501,68.578 ; 87.052,68.731 91.271,68.731 ; 87.052,68.885 90.964,68.885 ; 87.129,61.29 87.206,61.29 ; 87.129,63.438 89.047,63.438 ; 87.129,63.515 88.97,63.515 ; 87.129,63.592 88.97,63.592 ; 87.129,63.668 88.893,63.668 ; 87.129,63.745 88.893,63.745 ; 87.129,63.975 88.893,63.975 ; 87.129,64.129 88.893,64.129 ; 87.129,64.282 89.047,64.282 ; 87.129,64.359 89.123,64.359 ; 87.129,64.435 89.2,64.435 ; 87.129,64.512 89.277,64.512 ; 87.129,69.191 87.206,69.191 ; 87.206,63.208 89.584,63.208 ; 87.206,63.285 89.353,63.285 ; 87.206,63.362 89.2,63.362 ; 87.206,64.589 89.43,64.589 ; 87.206,64.666 89.584,64.666 ; 87.206,64.742 89.737,64.742 ; 87.206,64.819 89.89,64.819 ; 87.282,63.055 92.959,63.055 ; 87.282,63.131 92.805,63.131 ; 87.282,64.896 90.044,64.896 ; 87.282,69.191 87.436,69.191 ; 87.359,62.978 93.035,62.978 ; 87.359,64.972 90.274,64.972 ; 87.359,65.049 90.427,65.049 ; 87.436,62.825 93.189,62.825 ; 87.436,62.901 93.035,62.901 ; 87.436,65.126 90.657,65.126 ; 87.512,62.748 93.266,62.748 ; 87.512,65.203 90.811,65.203 ; 87.512,69.191 87.589,69.191 ; 87.589,62.671 93.342,62.671 ; 87.589,65.279 90.964,65.279 ; 87.589,65.356 91.118,65.356 ; 87.666,59.526 88.28,59.526 ; 87.666,59.756 88.28,59.756 ; 87.666,62.594 93.419,62.594 ; 87.666,69.191 87.743,69.191 ; 87.743,59.373 88.356,59.373 ; 87.743,59.449 88.28,59.449 ; 87.743,59.603 88.28,59.603 ; 87.743,59.68 88.356,59.68 ; 87.743,59.833 88.28,59.833 ; 87.743,59.91 88.356,59.91 ; 87.743,59.986 88.356,59.986 ; 87.743,62.518 93.496,62.518 ; 87.743,65.433 91.271,65.433 ; 87.819,59.219 88.433,59.219 ; 87.819,59.296 88.356,59.296 ; 87.819,60.063 88.433,60.063 ; 87.819,60.14 88.663,60.14 ; 87.819,65.509 91.348,65.509 ; 87.819,67.964 88.203,67.964 ; 87.819,69.191 87.896,69.191 ; 87.896,59.066 89.43,59.066 ; 87.896,59.143 88.663,59.143 ; 87.896,60.217 89.43,60.217 ; 87.896,62.441 93.649,62.441 ; 87.896,65.586 91.425,65.586 ; 87.973,58.989 89.43,58.989 ; 87.973,60.293 89.43,60.293 ; 87.973,62.364 93.726,62.364 ; 87.973,69.191 88.049,69.191 ; 88.049,60.37 89.277,60.37 ; 88.049,65.663 91.578,65.663 ; 88.126,58.912 89.277,58.912 ; 88.126,62.288 93.879,62.288 ; 88.126,65.74 91.655,65.74 ; 88.126,69.191 88.203,69.191 ; 88.203,60.447 89.2,60.447 ; 88.28,58.836 89.123,58.836 ; 88.28,62.211 93.956,62.211 ; 88.28,65.816 91.731,65.816 ; 88.28,67.964 88.817,67.964 ; 88.28,69.191 88.356,69.191 ; 88.433,65.893 91.808,65.893 ; 88.433,69.191 88.51,69.191 ; 88.51,60.523 88.74,60.523 ; 88.51,62.134 94.186,62.134 ; 88.586,58.759 88.663,58.759 ; 88.586,65.97 91.808,65.97 ; 88.663,69.191 88.74,69.191 ; 88.74,58.759 88.817,58.759 ; 88.74,59.143 89.507,59.143 ; 88.74,60.14 89.507,60.14 ; 88.74,62.058 94.339,62.058 ; 88.74,66.046 91.962,66.046 ; 88.817,69.191 88.893,69.191 ; 88.893,67.964 92.038,67.964 ; 88.97,59.219 89.584,59.219 ; 88.97,59.296 89.584,59.296 ; 88.97,60.063 89.584,60.063 ; 88.97,66.123 91.962,66.123 ; 88.97,69.191 89.047,69.191 ; 89.047,59.373 89.66,59.373 ; 89.047,59.526 89.66,59.526 ; 89.047,59.603 89.66,59.603 ; 89.047,59.756 89.66,59.756 ; 89.047,59.91 89.66,59.91 ; 89.047,59.986 89.584,59.986 ; 89.123,59.449 89.66,59.449 ; 89.123,59.68 89.66,59.68 ; 89.123,59.833 89.66,59.833 ; 89.123,61.981 94.646,61.981 ; 89.123,66.2 92.038,66.2 ; 89.123,69.191 89.277,69.191 ; 89.277,66.276 92.038,66.276 ; 89.353,69.191 89.43,69.191 ; 89.584,66.353 92.115,66.353 ; 89.584,69.191 89.66,69.191 ; 89.66,66.43 92.115,66.43 ; 89.737,61.904 89.814,61.904 ; 89.737,67.887 92.115,67.887 ; 89.814,60.14 90.964,60.14 ; 89.814,60.217 90.964,60.217 ; 89.814,60.293 90.351,60.293 ; 89.814,60.37 90.351,60.37 ; 89.814,60.447 90.197,60.447 ; 89.814,66.507 92.115,66.507 ; 89.89,60.523 90.044,60.523 ; 89.89,61.904 89.967,61.904 ; 89.967,66.583 92.192,66.583 ; 89.967,67.811 92.115,67.811 ; 90.121,60.063 91.041,60.063 ; 90.121,61.904 90.197,61.904 ; 90.121,66.66 92.192,66.66 ; 90.121,67.734 92.115,67.734 ; 90.197,66.737 92.192,66.737 ; 90.274,59.986 90.964,59.986 ; 90.274,66.813 92.192,66.813 ; 90.274,67.58 92.192,67.58 ; 90.274,67.657 92.192,67.657 ; 90.351,58.836 90.964,58.836 ; 90.351,59.296 90.964,59.296 ; 90.351,59.91 90.964,59.91 ; 90.351,61.904 90.504,61.904 ; 90.351,66.89 92.192,66.89 ; 90.351,66.967 92.268,66.967 ; 90.351,67.504 92.192,67.504 ; 90.427,58.912 90.964,58.912 ; 90.427,58.989 90.964,58.989 ; 90.427,59.066 90.964,59.066 ; 90.427,59.143 90.964,59.143 ; 90.427,59.219 90.964,59.219 ; 90.427,59.373 90.964,59.373 ; 90.427,59.449 90.964,59.449 ; 90.427,59.526 90.964,59.526 ; 90.427,59.603 91.041,59.603 ; 90.427,59.68 90.964,59.68 ; 90.427,59.756 90.964,59.756 ; 90.427,59.833 90.964,59.833 ; 90.427,60.293 90.964,60.293 ; 90.427,60.37 90.964,60.37 ; 90.427,60.447 90.964,60.447 ; 90.427,67.044 92.192,67.044 ; 90.427,67.12 92.268,67.12 ; 90.427,67.197 92.192,67.197 ; 90.427,67.35 92.192,67.35 ; 90.427,67.427 92.192,67.427 ; 90.504,67.274 92.268,67.274 ; 90.581,61.904 90.657,61.904 ; 90.734,61.904 90.811,61.904 ; 90.888,61.904 90.964,61.904 ; 91.118,61.904 91.194,61.904 ; 91.271,61.904 91.348,61.904 ; 91.425,59.603 92.038,59.603 ; 91.425,59.833 92.038,59.833 ; 91.425,59.91 92.038,59.91 ; 91.425,60.14 92.038,60.14 ; 91.425,60.293 92.038,60.293 ; 91.425,60.447 92.038,60.447 ; 91.425,60.6 92.038,60.6 ; 91.425,60.753 92.038,60.753 ; 91.425,60.83 92.038,60.83 ; 91.425,60.984 92.038,60.984 ; 91.501,59.373 92.115,59.373 ; 91.501,59.449 92.115,59.449 ; 91.501,59.526 92.038,59.526 ; 91.501,59.68 92.038,59.68 ; 91.501,59.756 92.038,59.756 ; 91.501,59.986 92.038,59.986 ; 91.501,60.063 92.038,60.063 ; 91.501,60.217 92.038,60.217 ; 91.501,60.37 92.038,60.37 ; 91.501,60.523 92.038,60.523 ; 91.501,60.677 92.038,60.677 ; 91.501,60.907 92.038,60.907 ; 91.501,61.06 92.038,61.06 ; 91.501,61.137 91.731,61.137 ; 91.501,61.904 91.578,61.904 ; 91.578,59.219 92.422,59.219 ; 91.578,59.296 92.192,59.296 ; 91.655,59.066 93.342,59.066 ; 91.655,59.143 93.342,59.143 ; 91.731,61.904 91.808,61.904 ; 91.808,58.989 93.266,58.989 ; 91.808,61.137 92.038,61.137 ; 91.885,58.912 93.189,58.912 ; 91.885,61.904 91.962,61.904 ; 91.962,58.836 92.959,58.836 ; 92.192,61.904 92.345,61.904 ; 92.192,65.279 94.033,65.279 ; 92.192,65.509 94.033,65.509 ; 92.192,65.74 94.033,65.74 ; 92.268,58.759 92.345,58.759 ; 92.268,64.819 94.109,64.819 ; 92.268,64.896 94.109,64.896 ; 92.268,64.972 94.033,64.972 ; 92.268,65.049 94.033,65.049 ; 92.268,65.126 94.033,65.126 ; 92.268,65.203 94.033,65.203 ; 92.268,65.356 94.033,65.356 ; 92.268,65.433 94.033,65.433 ; 92.268,65.586 94.033,65.586 ; 92.268,65.663 94.033,65.663 ; 92.268,65.816 94.033,65.816 ; 92.268,65.893 94.033,65.893 ; 92.268,65.97 94.033,65.97 ; 92.268,66.046 94.109,66.046 ; 92.268,66.123 94.033,66.123 ; 92.268,66.2 94.033,66.2 ; 92.268,66.276 94.109,66.276 ; 92.268,66.353 94.109,66.353 ; 92.345,64.435 94.186,64.435 ; 92.345,64.512 94.186,64.512 ; 92.345,64.589 94.109,64.589 ; 92.345,64.666 94.109,64.666 ; 92.345,64.742 94.109,64.742 ; 92.345,66.43 94.109,66.43 ; 92.345,66.507 94.186,66.507 ; 92.345,66.583 94.186,66.583 ; 92.345,66.66 94.186,66.66 ; 92.345,66.737 94.186,66.737 ; 92.345,66.813 94.263,66.813 ; 92.422,58.759 92.498,58.759 ; 92.422,61.904 92.498,61.904 ; 92.422,64.282 94.263,64.282 ; 92.422,64.359 94.263,64.359 ; 92.422,66.89 94.339,66.89 ; 92.498,64.052 94.416,64.052 ; 92.498,64.129 94.339,64.129 ; 92.498,64.205 94.263,64.205 ; 92.498,66.967 94.339,66.967 ; 92.498,67.044 94.416,67.044 ; 92.498,67.12 94.416,67.12 ; 92.498,67.197 94.493,67.197 ; 92.575,61.904 92.652,61.904 ; 92.575,63.822 94.57,63.822 ; 92.575,63.899 94.493,63.899 ; 92.575,63.975 94.493,63.975 ; 92.575,67.274 94.57,67.274 ; 92.652,58.759 92.729,58.759 ; 92.652,59.219 93.419,59.219 ; 92.652,63.745 94.646,63.745 ; 92.652,67.35 94.646,67.35 ; 92.652,67.427 94.723,67.427 ; 92.729,59.296 93.496,59.296 ; 92.729,61.904 92.805,61.904 ; 92.729,63.592 94.876,63.592 ; 92.729,63.668 94.723,63.668 ; 92.729,67.504 94.8,67.504 ; 92.729,67.58 94.953,67.58 ; 92.805,63.515 94.953,63.515 ; 92.805,67.657 95.107,67.657 ; 92.805,67.734 95.183,67.734 ; 92.882,59.373 93.496,59.373 ; 92.882,59.449 93.496,59.449 ; 92.882,63.362 95.337,63.362 ; 92.882,63.438 95.107,63.438 ; 92.882,67.811 95.567,67.811 ; 92.959,59.526 93.496,59.526 ; 92.959,59.603 93.496,59.603 ; 92.959,59.68 93.572,59.68 ; 92.959,59.756 93.572,59.756 ; 92.959,59.833 93.496,59.833 ; 92.959,59.91 93.572,59.91 ; 92.959,59.986 93.496,59.986 ; 92.959,60.063 93.496,60.063 ; 92.959,60.14 93.572,60.14 ; 92.959,60.217 93.572,60.217 ; 92.959,60.293 93.496,60.293 ; 92.959,60.37 93.572,60.37 ; 92.959,60.447 93.496,60.447 ; 92.959,60.6 93.496,60.6 ; 92.959,60.677 93.496,60.677 ; 92.959,60.753 93.572,60.753 ; 92.959,60.83 93.496,60.83 ; 92.959,60.907 93.572,60.907 ; 92.959,61.06 93.572,61.06 ; 92.959,61.137 93.496,61.137 ; 92.959,61.904 93.035,61.904 ; 92.959,63.285 95.72,63.285 ; 92.959,67.887 98.789,67.887 ; 93.035,60.523 93.572,60.523 ; 93.035,60.984 93.496,60.984 ; 93.035,63.131 98.789,63.131 ; 93.035,63.208 98.865,63.208 ; 93.035,67.964 98.712,67.964 ; 93.035,68.041 98.635,68.041 ; 93.112,61.904 93.189,61.904 ; 93.189,62.978 98.635,62.978 ; 93.189,63.055 98.712,63.055 ; 93.189,68.117 98.635,68.117 ; 93.189,68.194 98.482,68.194 ; 93.266,61.904 93.342,61.904 ; 93.342,62.825 98.482,62.825 ; 93.342,62.901 98.635,62.901 ; 93.342,68.271 98.482,68.271 ; 93.342,68.348 98.328,68.348 ; 93.419,61.904 93.496,61.904 ; 93.496,62.748 98.405,62.748 ; 93.496,68.424 98.252,68.424 ; 93.572,61.904 93.726,61.904 ; 93.572,62.671 98.328,62.671 ; 93.572,68.501 98.175,68.501 ; 93.649,62.594 98.252,62.594 ; 93.649,68.578 98.098,68.578 ; 93.726,62.518 98.098,62.518 ; 93.803,61.904 93.879,61.904 ; 93.803,68.654 97.945,68.654 ; 93.879,59.373 94.57,59.373 ; 93.879,59.526 94.493,59.526 ; 93.956,59.143 95.644,59.143 ; 93.956,59.219 94.646,59.219 ; 93.956,59.296 94.57,59.296 ; 93.956,59.449 94.493,59.449 ; 93.956,59.603 94.646,59.603 ; 93.956,59.68 94.723,59.68 ; 93.956,59.756 94.876,59.756 ; 93.956,61.904 94.033,61.904 ; 93.956,62.364 97.868,62.364 ; 93.956,62.441 98.021,62.441 ; 93.956,68.731 97.791,68.731 ; 94.033,59.066 95.644,59.066 ; 94.033,59.833 95.183,59.833 ; 94.033,60.677 94.109,60.677 ; 94.033,60.753 94.339,60.753 ; 94.033,60.83 95.567,60.83 ; 94.033,60.907 95.49,60.907 ; 94.033,60.984 95.413,60.984 ; 94.033,61.06 95.337,61.06 ; 94.033,68.808 97.638,68.808 ; 94.109,58.989 95.567,58.989 ; 94.109,59.91 95.183,59.91 ; 94.109,61.137 95.03,61.137 ; 94.109,61.904 94.186,61.904 ; 94.186,58.912 95.644,58.912 ; 94.186,59.986 95.337,59.986 ; 94.186,62.288 97.715,62.288 ; 94.263,60.063 95.413,60.063 ; 94.263,61.904 94.339,61.904 ; 94.263,68.885 97.485,68.885 ; 94.339,62.211 97.485,62.211 ; 94.416,58.836 95.49,58.836 ; 94.416,61.904 94.493,61.904 ; 94.416,68.961 97.254,68.961 ; 94.493,60.14 95.567,60.14 ; 94.493,62.134 97.408,62.134 ; 94.57,60.753 94.646,60.753 ; 94.57,61.214 94.646,61.214 ; 94.57,61.904 94.646,61.904 ; 94.646,60.217 95.567,60.217 ; 94.646,69.038 97.024,69.038 ; 94.723,58.759 94.8,58.759 ; 94.723,61.214 94.8,61.214 ; 94.723,61.904 94.8,61.904 ; 94.723,62.058 94.8,62.058 ; 94.8,60.293 95.567,60.293 ; 94.8,60.753 95.567,60.753 ; 94.876,58.759 94.953,58.759 ; 94.876,61.904 94.953,61.904 ; 94.876,62.058 97.101,62.058 ; 94.953,60.37 95.644,60.37 ; 94.953,60.677 95.644,60.677 ; 94.953,69.115 96.717,69.115 ; 95.03,60.447 95.644,60.447 ; 95.03,60.523 95.644,60.523 ; 95.03,60.6 95.567,60.6 ; 95.03,61.981 95.107,61.981 ; 95.107,58.759 95.183,58.759 ; 95.183,61.981 96.717,61.981 ; 95.26,59.219 95.644,59.219 ; 95.413,69.191 95.49,69.191 ; 95.49,59.296 95.644,59.296 ; 95.644,69.191 95.72,69.191 ; 95.797,61.904 95.874,61.904 ; 95.797,63.285 95.874,63.285 ; 95.797,67.811 95.874,67.811 ; 95.797,69.191 95.874,69.191 ; 95.874,59.91 96.564,59.91 ; 95.874,60.063 96.564,60.063 ; 95.95,59.603 96.564,59.603 ; 95.95,59.68 96.564,59.68 ; 95.95,59.756 96.564,59.756 ; 95.95,59.833 96.487,59.833 ; 95.95,59.986 96.487,59.986 ; 95.95,60.14 96.487,60.14 ; 95.95,60.217 96.564,60.217 ; 95.95,60.293 96.564,60.293 ; 95.95,60.37 96.564,60.37 ; 95.95,67.811 96.027,67.811 ; 96.027,59.449 96.641,59.449 ; 96.027,59.526 96.641,59.526 ; 96.027,60.447 96.641,60.447 ; 96.027,60.523 96.717,60.523 ; 96.027,60.6 96.717,60.6 ; 96.027,61.904 96.104,61.904 ; 96.027,63.285 96.18,63.285 ; 96.027,69.191 96.104,69.191 ; 96.104,59.296 96.794,59.296 ; 96.104,59.373 96.794,59.373 ; 96.104,60.677 96.871,60.677 ; 96.18,59.143 98.098,59.143 ; 96.18,59.219 97.024,59.219 ; 96.18,60.753 97.024,60.753 ; 96.18,61.904 96.257,61.904 ; 96.18,67.811 98.865,67.811 ; 96.18,69.191 96.257,69.191 ; 96.257,60.83 98.098,60.83 ; 96.257,60.907 97.945,60.907 ; 96.257,63.285 98.942,63.285 ; 96.334,59.066 98.021,59.066 ; 96.411,58.989 97.945,58.989 ; 96.411,60.984 97.868,60.984 ; 96.487,58.912 97.791,58.912 ; 96.487,61.06 97.791,61.06 ; 96.487,63.362 98.942,63.362 ; 96.487,67.734 98.942,67.734 ; 96.641,58.836 97.638,58.836 ; 96.717,61.137 97.485,61.137 ; 96.717,63.438 99.019,63.438 ; 96.717,67.657 98.942,67.657 ; 96.794,61.981 96.871,61.981 ; 96.871,58.759 96.948,58.759 ; 96.871,63.515 99.095,63.515 ; 96.871,67.58 99.019,67.58 ; 96.948,63.592 99.095,63.592 ; 96.948,67.504 99.095,67.504 ; 97.024,61.214 97.101,61.214 ; 97.024,63.668 99.172,63.668 ; 97.024,67.427 99.095,67.427 ; 97.101,58.759 97.178,58.759 ; 97.101,60.753 98.098,60.753 ; 97.178,61.214 97.254,61.214 ; 97.178,63.745 99.249,63.745 ; 97.178,67.35 99.172,67.35 ; 97.254,58.759 97.331,58.759 ; 97.254,59.219 98.175,59.219 ; 97.254,63.822 99.249,63.822 ; 97.254,63.899 99.249,63.899 ; 97.254,67.197 99.249,67.197 ; 97.254,67.274 99.172,67.274 ; 97.331,63.975 99.326,63.975 ; 97.331,67.12 99.249,67.12 ; 97.408,60.677 98.175,60.677 ; 97.408,64.052 99.326,64.052 ; 97.408,67.044 99.326,67.044 ; 97.485,59.296 98.175,59.296 ; 97.485,64.129 99.402,64.129 ; 97.485,64.205 99.402,64.205 ; 97.485,66.89 99.402,66.89 ; 97.485,66.967 99.326,66.967 ; 97.561,59.373 98.252,59.373 ; 97.561,60.6 98.252,60.6 ; 97.561,64.282 99.402,64.282 ; 97.561,64.359 99.479,64.359 ; 97.561,66.737 99.402,66.737 ; 97.561,66.813 99.402,66.813 ; 97.638,59.449 98.252,59.449 ; 97.638,60.447 98.252,60.447 ; 97.638,60.523 98.252,60.523 ; 97.638,64.435 99.479,64.435 ; 97.638,64.512 99.479,64.512 ; 97.638,66.507 99.479,66.507 ; 97.638,66.583 99.479,66.583 ; 97.638,66.66 99.479,66.66 ; 97.715,59.526 98.328,59.526 ; 97.715,59.603 98.328,59.603 ; 97.715,59.68 98.405,59.68 ; 97.715,59.756 98.328,59.756 ; 97.715,60.293 98.328,60.293 ; 97.715,60.37 98.328,60.37 ; 97.715,64.589 99.479,64.589 ; 97.715,64.666 99.556,64.666 ; 97.715,64.742 99.556,64.742 ; 97.715,64.819 99.556,64.819 ; 97.715,66.276 99.556,66.276 ; 97.715,66.353 99.479,66.353 ; 97.715,66.43 99.479,66.43 ; 97.791,59.833 98.405,59.833 ; 97.791,59.91 98.328,59.91 ; 97.791,59.986 98.405,59.986 ; 97.791,60.063 98.405,60.063 ; 97.791,60.14 98.405,60.14 ; 97.791,60.217 98.328,60.217 ; 97.791,64.896 99.556,64.896 ; 97.791,64.972 99.556,64.972 ; 97.791,65.049 99.556,65.049 ; 97.791,65.126 99.632,65.126 ; 97.791,65.203 99.556,65.203 ; 97.791,65.279 99.556,65.279 ; 97.791,65.356 99.632,65.356 ; 97.791,65.509 99.556,65.509 ; 97.791,65.586 99.632,65.586 ; 97.791,65.663 99.556,65.663 ; 97.791,65.816 99.556,65.816 ; 97.791,65.893 99.556,65.893 ; 97.791,65.97 99.556,65.97 ; 97.791,66.046 99.556,66.046 ; 97.791,66.123 99.556,66.123 ; 97.791,66.2 99.556,66.2 ; 97.868,65.433 99.556,65.433 ; 97.868,65.74 99.632,65.74
  Bottom Layer w0.254: 23.9,52.4 27.4,52.4 32,47.8 49.9,47.8 68.074,47.8 70.989,44.885 79.715,44.885 83.1,41.5 ; 24,51.384 26.979,51.384 27.082,51.282 31.593,46.77 49.2,46.77 67.668,46.77 70.569,43.869 79.09,43.869 81.461,41.498 81.461,40.8 82.192,40.069 82.931,40.069 83.1,39.9 ; 24,51.892 27.19,51.892 31.79,47.292 46.6,47.292 46.614,47.278 67.878,47.278 70.779,44.377 79.3,44.377 81.969,41.708 81.969,41.092 82.192,40.869 82.931,40.869 83.1,40.7 ; 70.7,43.3 76,43.3 79.3,40 79.3,39.4 79.6,39.1 83.1,39.1 ; 77,32.7 77,33.2 77.1,33.3 78.984,35.184 79.721,35.184 80.437,35.9 83.1,35.9 ; 78.955,33.7 80.355,35.1 83.1,35.1 ; 79.058,33.084 80.274,34.3 83.1,34.3 ; 79.268,32.576 80.192,33.5 83.1,33.5 ; 79.3,36.2 80.6,37.5 83.1,37.5 ; 79.51,35.692 80.518,36.7 83.1,36.7 ; 80.509,44.809 82.018,43.3 84.9,43.3 ; 92.9,43.3 95.5,45.9 99.5,45.9 ; 94.7,33.5 94.7,32.3 96.6,30.4 ; 94.7,34.3 94.869,34.131 95.608,34.131 95.831,33.908 95.831,33.769 98.9,30.7 ; 94.7,35.1 97.882,35.1 99.29,33.692 99.5,33.692 ; 94.7,35.9 97.8,35.9 99.5,34.2 ; 94.7,36.7 98.4,36.7 ; 94.7,37.5 98.7,37.5 99.7,36.5 ; 94.7,38.3 98.7,38.3 99.6,37.4 ; 94.7,39.1 96.5,39.1 96.7,38.9 98.1,38.9 98.5,39.3 99.6,40.4 ; 94.7,39.9 98,39.9 99.5,41.4 ; 94.7,40.7 95.8,40.7 97.9,42.8 99.6,42.8 ; 94.7,41.5 95.8,41.5 99.5,45.2

## Keep-outs
Keep-Out Layer:
  the board outline again, w0.1

## Other copper
Top Layer:
  rectangle: 21.6,47.6 31.6,57.6
  rectangle: 32,48.9 33,49.9
  text "0" at 20.5,66.9 h1.52
  text "cm" at 22,66.9 h0.75
  text "1" at 30.5,66.9 h1.52
  text "2" at 40.5,66.9 h1.52
  text "3" at 50.5,66.9 h1.52
  text "4" at 60.5,66.9 h1.52
  text "5" at 70.5,66.9 h1.52
  text "6" at 80.5,66.9 h1.52
  text "7" at 90.5,66.9 h1.52
  text "1mm^2" at 33.2,49 h0.5
  text "1cm^2" at 31.9,47.6 h0.7
  text "Trace  / width" at 33.37,39.8 h0.5
  text "Max Amps / @ 10deg C Rise" at 36.61,39.743 h0.45
  text "1.27mm" at 33.38,38.98 h0.5
  text "2.9" at 36.73,38.97 h0.5
  text ".635mm" at 33.3,38.1 h0.5
  text "1.7" at 36.75,38.03 h0.5
  text ".508mm" at 33.3,37.3 h0.5
  text "1.5" at 36.73,37.17 h0.5
  text ".381mm" at 33.3,36.5 h0.5
  text "1.2" at 36.72,36.49 h0.5
  text "1" at 36.71,35.81 h0.5
  text ".305mm" at 33.3,35.8 h0.5
  text ".9" at 36.71,35.15 h0.5
  text ".254mm" at 33.3,35.1 h0.5
  text ".6" at 36.69,34.34 h0.5
  text ".127mm" at 33.3,34.3 h0.5
  text "0" at 20.32,32.158 h1.52
  text "in" at 21.844,32.158 h1
  text "1" at 46.736,32.158 h1.52
  text "2" at 74.422,32.158 h1.52